# Altium PCB PCB1.PcbDoc
Units mil, origin at the board's own origin, x right, y up, seen from the top; angles counter-clockwise.
Board outline 4380 x 3975 mil, 2 copper layers (Top Layer, Bottom Layer); 36 components, 30 nets, 136 pads, 0 vias.
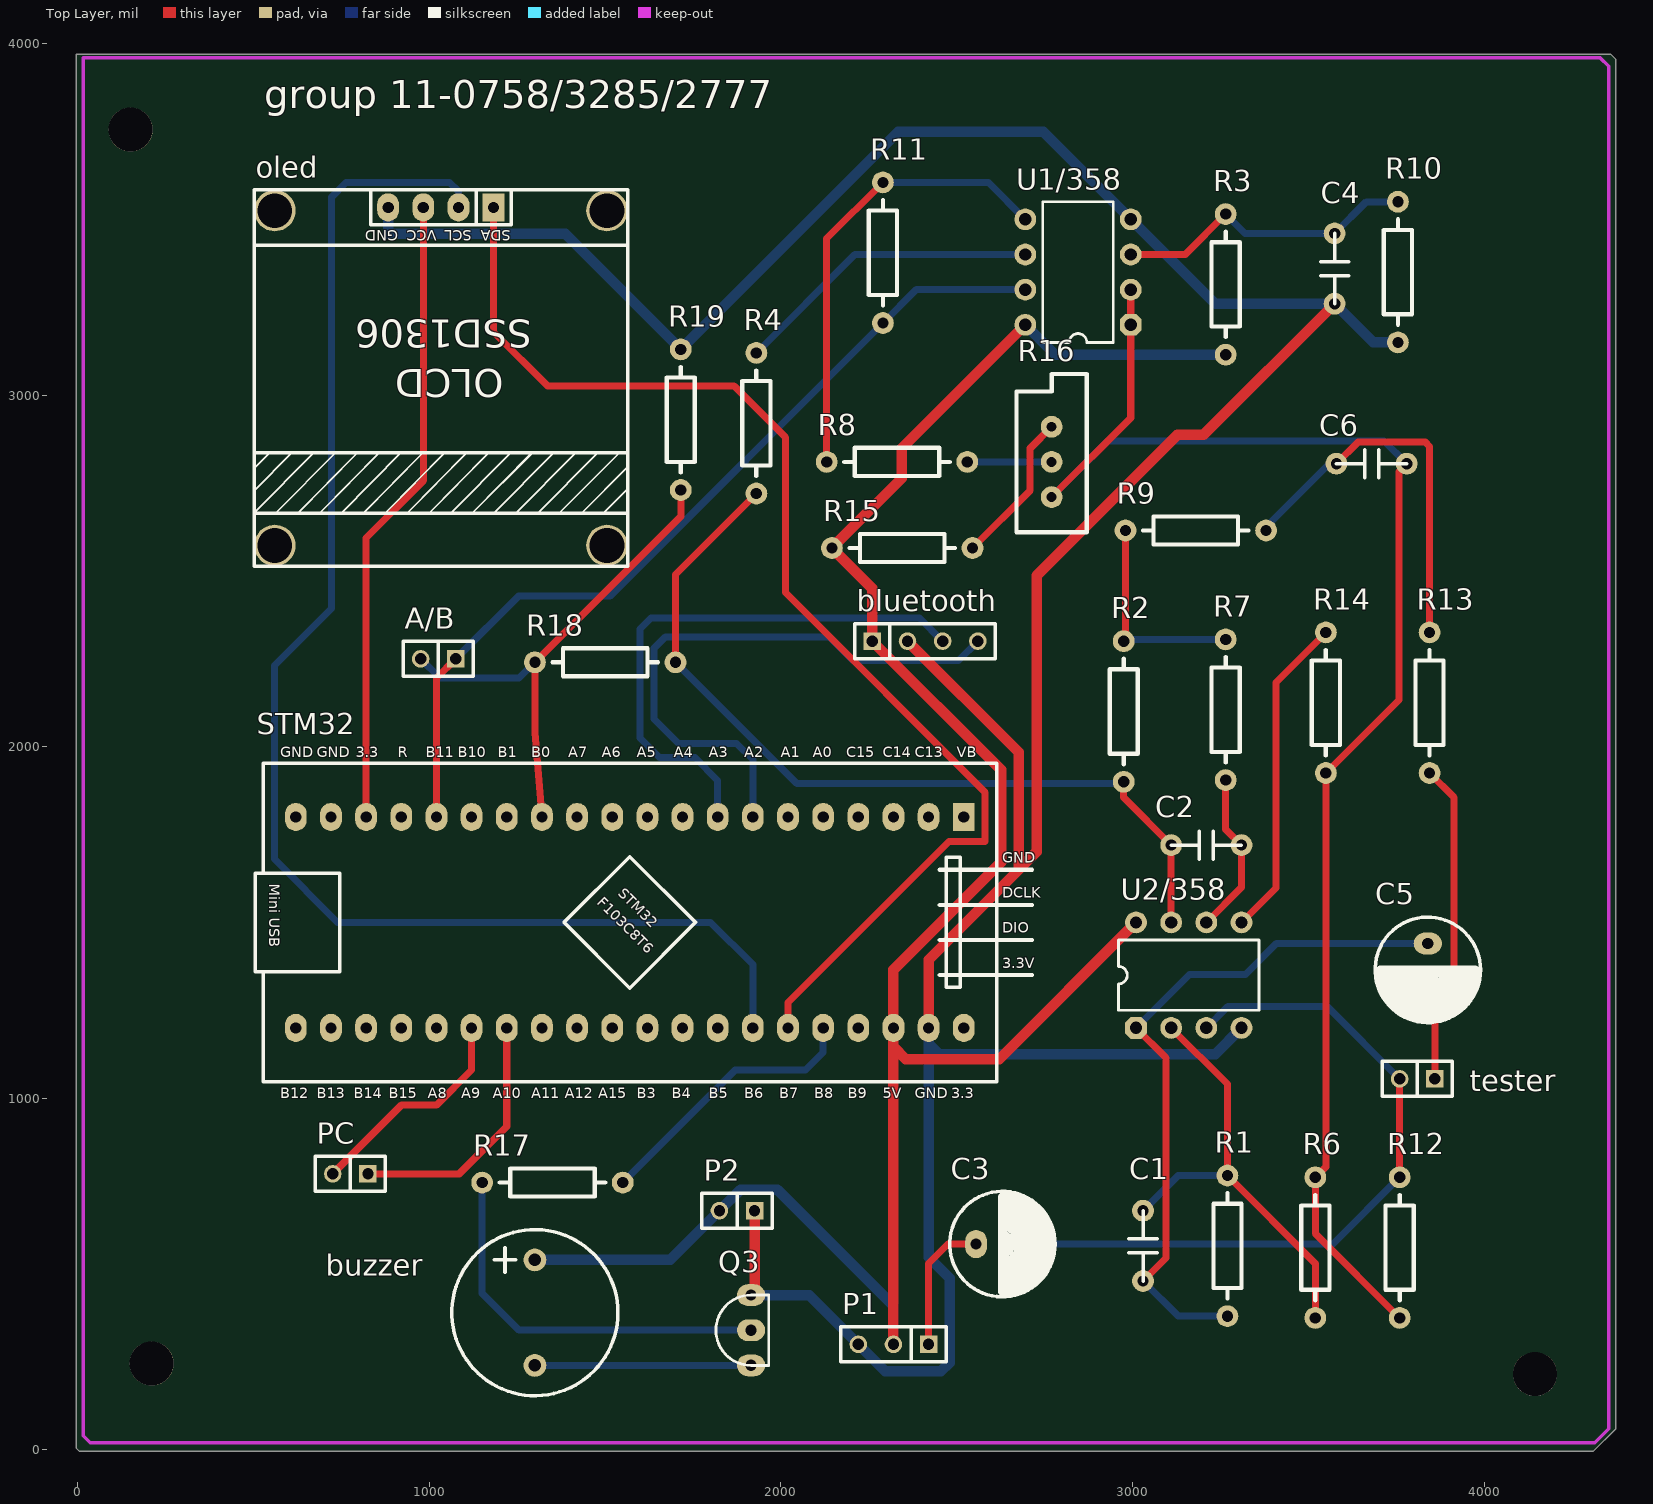
[diagram p0: Top Layer view]
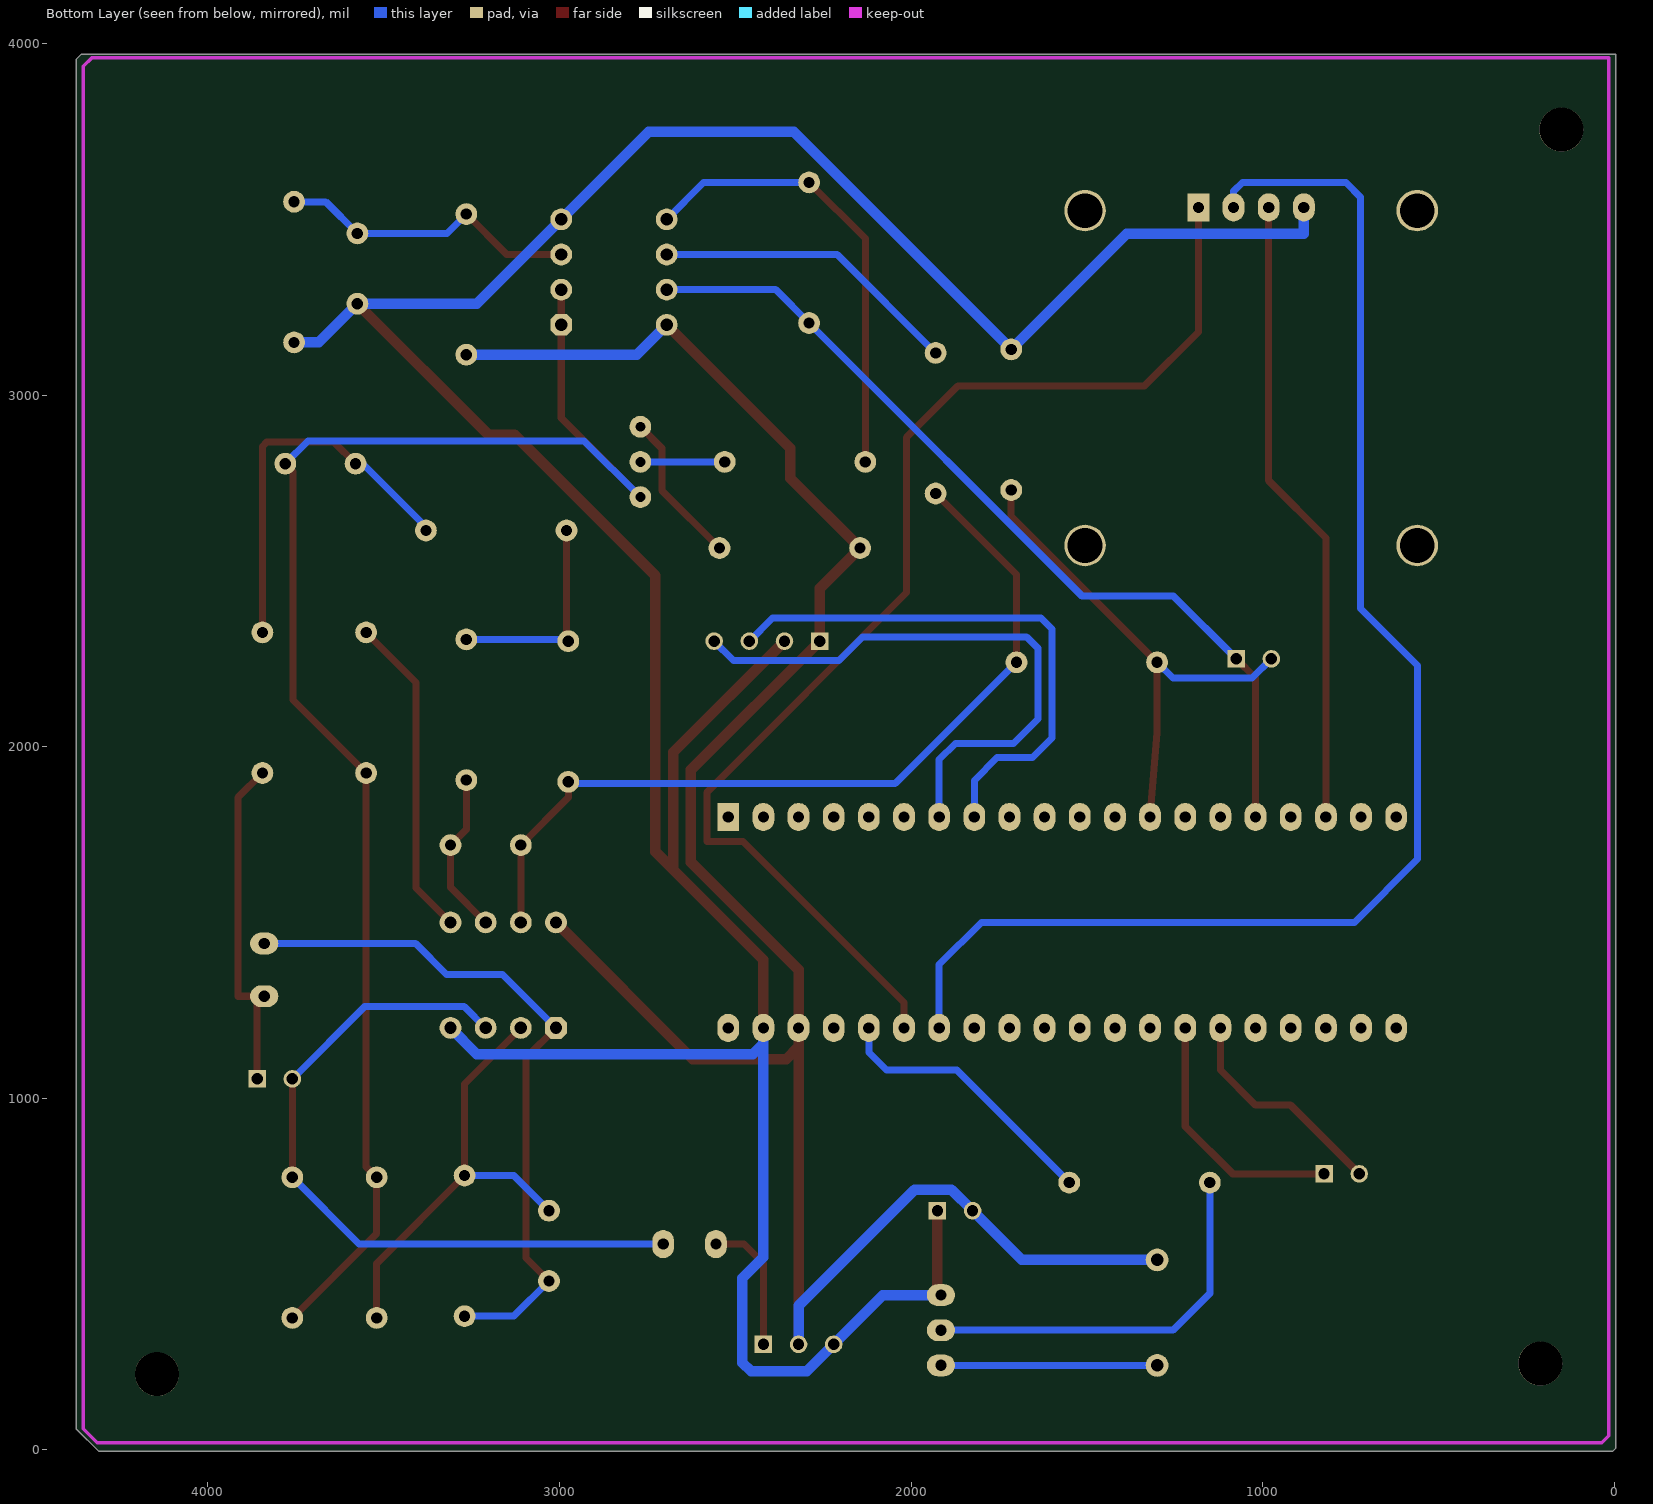
[diagram p1: Bottom Layer view, seen from below]

## Layer stack, top to bottom
Top Solder: solder mask 0.4, Solder Resist, Dk 3.5
Top Layer: signal copper 1.4
Dielectric1: dielectric 12.6, FR-4, Dk 4.8
Bottom Layer: signal copper 1.4
Bottom Solder: solder mask 0.4, Solder Resist, Dk 3.5

## Board outline
-5,5 5,-5 4310,-5 4375,60 4375,3955 4360,3970 -5,3970

## Design rules (kind name [scope] priority, off if disabled: settings)
Clearance [All] p1: gap=20 ignorepadtopadclearanceinfootprint=TRUE
FabricationTestPointUsage TestPointUsage [All] p1: valid=0 allowmultiple=FALSE
FabricationTestpoint Testpoint [All] p1: side=3 testpointundercomponent=TRUE minsize=40 maxsize=100 preferedsize=60 minholesize=0 maxholesize=40 preferedholesize=32 testpointgrid=1 allowsidetop=TRUE allowsidebottom=TRUE usegrid=TRUE gridtolerance=0.01
PolygonConnect [All] p1: connectstyle=Relief reliefconductorwidth=10 reliefentries=4 polygonreliefangle="90 Angle" airgapwidth=10
RoutingVias [All] p1: holewidth=28 width=50 viastyle="Through Hole" minholewidth=28 minwidth=50 maxholewidth=28 maxwidth=50
SilkToSolderMaskClearance SilkscreenOverComponentPads [IsPad] p1: minsilkscreentomaskgap=10 clearancetoexposedcopper=TRUE
SolderMaskExpansion [All] p1: expansion=4 istentingtop=FALSE
Width Width_2 [InNet('VDD')] p1: maxlimit=30 minlimit=10 preferedwidth=30 minimp=50.000000 maximp=50.000000 favimp=50.000000
Width Width_1 [InNet('GND')] p2: maxlimit=30 minlimit=30 preferedwidth=30 minimp=50.000000 maximp=50.000000 favimp=50.000000
Width [All] p3: maxlimit=30 minlimit=15 preferedwidth=20 minimp=50.000000 maximp=50.000000 favimp=50.000000
27 further rules are at their usual default settings.

## Components (designator, comment, footprint, x,y, rotation, side; value= is the part's Value field where it differs from the comment)
A/B "A\Btester" SIP2 1075,2250 r180 top (schematic designator P3)
bluetooth "blue-tooth" SIP4 2260,2300 r0 top (schematic designator P5)
buzzer "BUZZER" Buzzer 1300,540 r270 top (schematic designator U4)
C1 "0.01uF" C2 3030,680 r270 top value=10pF
C2 "0.1uF" C2 3310,1720 r180 top value=10pF
C3 "2.2uF" RB.15/.3 2555,585 r0 top
C4 "0.1uF" C2 3575,3260 r90 top value=10pF
C5 "2.2uF" RB.15/.3 3840,1440 r270 top
C6 "1uF" C2 3580,2805 r0 top value=10pF
oled "oled" SSD1306 501.06,3584.06 r180 top (schematic designator P6)
P1 "Header 3" SIP3 2420,300 r180 top
P2 "source" SIP2 1925,680 r180 top
PC "PC" SIP2 825,785 r180 top (schematic designator P4)
Q3 "NPN" TO-P2 1915,240 r90 top
R1 "1.2M" AXIAL0.4 3270,780 r270 top
R2 "200k" AXIAL0.4 2975,1900 r90 top
R3 "47k" AXIAL0.4 3265,3115 r90 top
R4 "10k" AXIAL0.4 1930,3120 r270 top
R6 "10k" AXIAL0.4 3520,775 r270 top
R7 "20k" AXIAL0.4 3265,1905 r90 top
R8 "10k" AXIAL0.4 2130,2810 r0 top
R9 "20k" AXIAL0.4 3380,2615 r180 top
R10 "47k" AXIAL0.4 3755,3550 r270 top
R11 "200k" AXIAL0.4 2290,3605 r270 top
R12 "10k" AXIAL0.4 3760,375 r90 top
R13 "20k" AXIAL0.4 3845,1925 r90 top
R14 "20k" AXIAL0.4 3550,1925 r90 top
R15 "20k" AXIAL0.4 2545,2565 r180 top
R16 "RPot" VR5 2770,2710 r90 top value=1K
R17 "1k" AXIAL0.4 1150,760 r0 top
R18 "1k" AXIAL0.4 1300,2240 r0 top
R19 "1.5k" AXIAL0.4 1715,2730 r90 top
STM32 "STM32103C8T6" STM32F103C8T6 1570,1500 r270 top
tester "Header 2" SIP2 3860,1055 r180 top (schematic designator P)
U1/358 "LM358J" DIP-8 2995,3200 r180 top (schematic designator U1)
U2/358 "LM358J" DIP-8 3010,1200 r90 top (schematic designator U2)

## Footprints (in the part's own frame and the unit in brackets; to place one, negate y for a bottom-side part, rotate by r counter-clockwise, add the part's x,y. Pads: shape width x height; smd on the part's side, far side on the other; paste and mask are expansions set on the pad)
AXIAL0.4 [mil]
  round 62 hole 32: 1(0,0) 2(400,0)
  silkscreen extent 50,-40 350,40
Buzzer [mil] "蜂鸣器"
  round 65 hole 36: 1(0,0) 2(300,0)
  silkscreen extent -86,-236 386,236
C2 [mil]
  round 62 hole 32: 1(0,0) 2(200,0)
  silkscreen extent 0,-40 200,40, body extent -59,-49 256,49, height 413
DIP-8 [mil]
  oct 62x62 hole 35: 1(0,0)
  round 62 hole 35: 2(0,-100) 3(0,-200) 4(0,-300) 5(300,-300) 6(300,-200) 7(300,-100) 8(300,0)
  silkscreen extent 50,-350 250,50
RB.15/.3 [mil]
  oval 62x80 hole 32: 1(0,0) 2(150,0)
  silkscreen extent -75,-150 225,150, body extent -82,-159 232,155, height 504
SIP2 [mil]
  rect 50x50 hole 32: 1(0,0)
  round 50 hole 32: 2(100,0)
  silkscreen extent -50,-50 150,50
SIP3 [mil]
  rect 50x50 hole 32: 1(0,0)
  round 50 hole 32: 2(100,0) 3(200,0)
  silkscreen extent -50,-50 250,50
SIP4 [mil]
  rect 50x50 hole 32: 1(0,0)
  round 50 hole 32: 2(100,0) 3(200,0) 4(300,0)
  silkscreen extent -50,-50 350,50
SSD1306 [mm] "OLCD"
  round 3 hole 2.5: 0(-25.5,25.7) 0(-25.5,1.5) 0(-1.5,25.7) 0(-1.5,1.5)
  rect 1.575x2.032 hole 0.813: 1(-17.31,1.27)
  oval 1.575x2.032 hole 0.813: 2(-14.77,1.27) 3(-12.23,1.27) 4(-9.69,1.27)
  silkscreen extent -27.03,0 0.03,27.2, body extent -18.58,0 -8.42,2.54, height 3
STM32F103C8T6 [mil]
  rect 80x62 hole 32: 1(-300,950)
  oval 80x62 hole 32: 2(-300,850) 3(-300,750) 4(-300,650) 5(-300,550) 6(-300,450) 7(-300,350) 8(-300,250) 9(-300,150) 10(-300,50) 11(-300,-50) 12(-300,-150) 13(-300,-250) 14(-300,-350) 15(-300,-450) 16(-300,-550) 17(-300,-650) 18(-300,-750) 19(-300,-850) 20(-300,-950) 21(300,-950) 22(300,-850) 23(300,-750) 24(300,-650) 25(300,-550) 26(300,-450) 27(300,-350) 28(300,-250) 29(300,-150) 30(300,-50) 31(300,50) 32(300,150) 33(300,250) 34(300,350) 35(300,450) 36(300,550) 37(300,650) 38(300,750) 39(300,850) 40(300,950)
  silkscreen extent -453,-1066 453,1144, body extent -305,-1032 305,1032, height 224
TO-P2 [mil]
  oval 62x80 hole 32: 1(0,0) 2(100,0) 3(200,0)
  silkscreen extent 0,-50 200,100
VR5 [mil]
  round 62 hole 28: 1(0,0) 2(200,0) 3(100,0)
  silkscreen extent -100,-100 350,100

## Part data
A/B P2 PC: library part "Header 2", "Header, 2-Pin", LatestRevisionDate=17-Jul-2002, LatestRevisionNote="Re-released for DXP Platform.", Publisher="Altium Limited"
bluetooth oled: library part "Header 4", "Connector"
buzzer: "Buzzer"
C1 C2 C4 C6: library part Cap, "Capacitor", LatestRevisionDate=17-Jul-2002, LatestRevisionNote="Re-released for DXP Platform.", PackageDescription="Radial Cap, Thru-Hole; 2 Leads; 0.3 in Pin Spacing", PackageReference=RAD-0.3, Published=8-Jun-2000, Publisher="Altium Limited"
C3 C5: library part Cap2, "电解电容"
P1: "Header, 3-Pin", LatestRevisionDate=17-Jul-2002, LatestRevisionNote="Re-released for DXP Platform.", Publisher="Altium Limited"
Q3: "NPN Bipolar Transistor", Code_JEDEC=TO-226-AA, LatestRevisionDate=17-Jul-2002, LatestRevisionNote="Re-released for DXP Platform.", PackageReference=TO-226, Published=8-Jun-2000, Publisher="Altium Limited"
R1 R2 R3 R4 R6 R7 R8 R9 R10 R11 R12 R13 R14 R15 R17 R18 R19: library part RES1
R16: "Potentiometer", LatestRevisionDate=17-Jul-2002, LatestRevisionNote="Re-released for DXP Platform.", PackageDescription="Variable Resistor, Thru-Hole; 3 Leads", PackageReference=VR5, Published=8-Jun-2000, Publisher="Altium Limited", Set Position=0.5, Sim Note="Enter the Resistance value and the set point into parameter fields."
tester: "Header, 2-Pin", LatestRevisionDate=17-Jul-2002, LatestRevisionNote="Re-released for DXP Platform.", Publisher="Altium Limited"
U1/358 U2/358: "Dual Low-Power Operational Amplifier", Code_JEDEC=MO-001-AN, ComponentLink1Description="Manufacturer Link", ComponentLink1URL=http://www.onsemi.com/site/products/parametrics/0,4446,251,00.html, ComponentLink2Description=Datasheet, ComponentLink2URL=http://www.onsemi.com/pub/Collateral/LM358-D.PDF, DatasheetVersion=1988, LatestRevisionDate=06-Jun-2005, LatestRevisionNote="Stylized 3D Model Added.", PackageDescription="DIP; 8 Leads; Row Spacing 7.62 mm; Pitch 2.54 mm", PackageReference=693-02, Published=17-Jul-2002, Publisher="Altium Limited"

## Free pads (board coordinates)
  round 125 hole 125 unplated paste+0: ""(150,3755)
  round 125 hole 125: ""(210,245)
  round 125 hole 125 unplated: ""(4145,215)

## Nets (pads, with @x,y where several pads share a name; then routed paths per layer and width w, separated by ;. In a path a pad name is that pad's centre, name@x,y a point inside that pad or via, vN(x,y) a via of type N, cw(c..) or ccw(c..) an arc to the next point about the centre after c; other vN are vias at no path point)
0-RX: PC.1 STM32.27 | length 730.9
  Top Layer w20: PC.1 1085,785 1220,920 STM32.27
0-TX: PC.2 STM32.26 | length 637.2
  Top Layer w20: PC.2 920,980 1020,980 1120,1080 STM32.26
A: C2.2 R2.1 R4.2 R18.2 U2/358.7 | length 2449.1
  Top Layer w20: R18.2 1700,2490 R4.2 ; R2.1 2975,1855 C2.2 U2/358.7
  Bottom Layer w20: R18.2 2045,1895 R2.1@2975,1895
B: A/B.1 R11.2 STM32.16 U1/358.7 | length 2527.7
  Top Layer w20: STM32.16 1020,2195 A/B.1
  Bottom Layer w20: A/B.1 1253,2428 1513,2428 R11.2 2385,3300 U1/358.7
GND: bluetooth.2 C4.1 oled.4 P1.3 P2.1 Q3.3 R10.2 R19.2 STM32.39 U1/358.4 U2/358.4 | length 9776.5
  Top Layer w30: Q3.3 1925,440 P2.1 ; bluetooth.2 2676,1984 2676,1650 ; STM32.39 2420,1394 2676,1650 ; C4.1 3202,2887 3128,2887 2727,2486 2727,1701 2676,1650
  Bottom Layer w30: oled.4 882.56,3459 1386,3459 R19.2 2334,3749 2746,3749 U1/358.4 3235,3260 C4.1 3685,3150 R10.2 ; Q3.3 2080,440 P1.3 2297,223 2455,223 2480,248 2480,488 2420,548 2420,1155 ; STM32.39 2420,1155 ; U2/358.4 3235,1125 2450,1125 2420,1155
NetC1_1: C1.1 R1.1 R6.2 U2/358.2 | length 1276.2
  Top Layer w20: U2/358.2 3270,1040 R1.1 3520,530 R6.2
  Bottom Layer w20: C1.1 3130,780 R1.1
NetC1_2: C1.2 C5.1 R1.2 U2/358.1 | length 1993
  Top Layer w20: U2/358.1 3095,1115 3095,545 C1.2
  Bottom Layer w20: U2/358.1 3162,1352 3321,1352 3409,1440 C5.1 ; C1.2 3130,380 R1.2
NetC2_1: C2.1 R7.1 U2/358.6 | length 465.1
  Top Layer w20: U2/358.6 3310,1600 C2.1 3265,1765 R7.1
NetC3_1: C3.1 P1.1 | length 387.8
  Top Layer w20: P1.1 2420,530 2475,585 C3.1
NetC4_2: C4.2 R3.2 R10.1 U1/358.3 | length 867.7
  Top Layer w20: U1/358.3 3150,3400 R3.2
  Bottom Layer w20: R3.2 3320,3460 C4.2 3665,3550 R10.1
NetC6_1: C6.1 R9.1 R13.2 | length 1113.1
  Top Layer w20: C6.1 3641,2866 3833.28,2866 3845,2854.28 R13.2
  Bottom Layer w20: R9.1@3370,2615 3560,2805 C6.1
NetP3_2: A/B.2 R18.1 R19.1 STM32.13 | length 1469.2
  Top Layer w20: STM32.13 1300,2040 R18.1 1715,2655 R19.1
  Bottom Layer w20: A/B.2 1030,2195 1255,2195 R18.1
NetQ3_1: buzzer.2 Q3.1 | length 615
  Bottom Layer w20: buzzer.2 Q3.1
NetQ3_2: Q3.2 R17.1 | length 1123.5
  Bottom Layer w20: R17.1 1150,445 1255,340 Q3.2
NetR2_2: R2.2 R7.2 R9.2 | length 612.1
  Top Layer w20: R2.2@2980,2295 R9.2
  Bottom Layer w20: R2.2 2980,2305 R7.2
NetR4_1: R4.1 U1/358.6 | length 881
  Bottom Layer w20: R4.1 2210,3400 U1/358.6
NetR8_1: R8.1 R11.1 U1/358.5 | length 1309.8
  Top Layer w20: R8.1 2130,3445 R11.1
  Bottom Layer w20: R11.1 2590,3605 U1/358.5
NetR8_2: R8.2 R16.3 | length 240
  Bottom Layer w20: R8.2 R16.3
NetR14_2: R14.2 U2/358.5 | length 924.4
  Top Layer w20: U2/358.5 3408,1598 3408,2183 R14.2
NetR15_1: R15.1 R16.2 | length 438.2
  Top Layer w20: R15.1 2709,2729 2709,2849 R16.2
NetR17_2: R17.2 STM32.36 | length 793.3
  Bottom Layer w20: R17.2 1870,1080 2070,1080 2120,1130 STM32.36
RX: bluetooth.3 STM32.8 | length 1586.3
  Bottom Layer w20: STM32.8 1820,1904 1755,1969 1655,1969 1599,2025 1599,2335 1630,2366 2394,2366 bluetooth.3
SCL: oled.2 STM32.34 | length 4050.6
  Bottom Layer w20: oled.2 1082.56,3580 1057.56,3605 763,3605 721,3563 721,2393 559,2231 559,1680 739,1500 1800,1500 1920,1380 STM32.34
SDA: oled.1 STM32.35 | length 3516.7
  Top Layer w20: oled.1 1182.56,3180 1336.56,3026 1867,3026 2013,2880 2013,2438 2581,1870 2581,1730 2478,1730 2020,1272 STM32.35
TESTER1: C3.2 R12.2 tester.2 U2/358.3 | length 2074.3
  Top Layer w20: R12.2 tester.2
  Bottom Layer w20: C3.2 3570,585 R12.2 ; U2/358.3 3271,1261 3554,1261 tester.2
TESTER2: C5.2 R13.1 tester.1 | length 972.6
  Top Layer w20: C5.2 C5.2@3860,1290 ; R13.1 3914,1856 3914,1290 C5.2@3860,1290 ; tester.1 C5.2@3860,1290
TX: bluetooth.4 STM32.7 | length 1677.8
  Bottom Layer w20: STM32.7 1920,1963 1873.71,2009.29 1708.71,2009.29 1639,2079 1639,2280 1671,2312 2138,2312 2205,2245 2505,2245 bluetooth.4
VCC3.3V: oled.3 STM32.18 | length 1801.4
  Top Layer w20: STM32.18 820,2594 982.56,2756.56 oled.3
VD: C6.2 R6.1 R12.1 R14.1 R16.1 U1/358.1 U1/358.2 | length 4423.5
  Top Layer w20: R16.1 2995,2935 U1/358.1 U1/358.2 ; R12.1 3520,615 R6.1 3550,805 R14.1 3758,2133 3758,2783 C6.2
  Bottom Layer w20: R16.1 2930,2870 3715,2870 C6.2
VDD: bluetooth.1 buzzer.1 P1.2 P2.2 R3.1 R15.2 STM32.38 U1/358.8 U2/358.8 | length 6274.2
  Top Layer w30: P1.2 2320,1146 ; U1/358.8 2493,2998 2343.86,2848.86 2343.86,2763.86 R15.2 2260,2450 bluetooth.1 2626,1934 2626,1671 2320,1365 STM32.38 2320,1146 ; U2/358.8 2621,1111 2355,1111 2320,1146
  Bottom Layer w30: buzzer.1 1685,540 P2.2 1885,740 1990,740 2320,410 P1.2 ; U1/358.8 2780,3115 R3.1
pads on no net: oled.0 STM32.1 STM32.2 STM32.3 STM32.4 STM32.5 STM32.6 STM32.9 STM32.10 STM32.11 STM32.12 STM32.14 STM32.15 STM32.17 STM32.19 STM32.20 STM32.21 STM32.22 STM32.23 STM32.24 STM32.25 STM32.28 STM32.29 STM32.30 STM32.31 STM32.32 STM32.33 STM32.37 STM32.40

## Keep-outs
Keep-Out Layer:
  lines w10: 15,40 35,20 4315,20 4355,60 4355,3935 4330,3960 15,3960 15,40

## Silkscreen, mask and mechanical layers (free items; w line width, h text height)
Top Overlay:
  text "group 11-0758/3285/2777" at 530,3816.66 h80
Mechanical 1:
  the board outline again, w10

## Text inside footprints (layer, text, board x,y; h text height)
oled: Top Overlay "OLCD" at 1211.06,3074.06 h80 r180; Top Overlay "SSD1306" at 1291.06,3214.06 h80 r180; Top Overlay "SDA" at 1231.06,3469.06 h30 r180; Top Overlay "SCL" at 1121.06,3469.06 h30 r180; Top Overlay "VCC" at 1021.06,3469.06 h30 r180; Top Overlay "GND" at 911.06,3469.06 h30 r180
STM32: Top Overlay "F103C8T6" at 1475,1555 h30 r315; Top Overlay "3.3" at 2485,1000 h30; Top Overlay "GND" at 2380,1000 h30; Top Overlay "B4" at 1690,1000 h30; Top Overlay "5V" at 2290,1000 h30; Top Overlay "B9" at 2190,1000 h30; Top Overlay "B8" at 2095,1000 h30; Top Overlay "B7" at 1995,1000 h30; Top Overlay "B6" at 1895,1000 h30; Top Overlay "B5" at 1795,1000 h30; Top Overlay "B3" at 1590,1000 h30; Top Overlay "A15" at 1480,1000 h30; Top Overlay "A12" at 1385,1000 h30; Top Overlay "A11" at 1290,1000 h30; Top Overlay "A10" at 1180,1000 h30; Top Overlay "A9" at 1090,1000 h30; Top Overlay "A8" at 995,1000 h30; Top Overlay "B15" at 885,1000 h30; Top Overlay "B14" at 785,1000 h30; Top Overlay "B13" at 680,1000 h30; Top Overlay "B12" at 575,1000 h30; Top Overlay "GND" at 575,1970 h30; Top Overlay "GND" at 680,1970 h30; Top Overlay "3.3" at 790,1970 h30; Top Overlay "R" at 910,1970 h30; Top Overlay "B11" at 990,1970 h30; Top Overlay "B10" at 1080,1970 h30; Top Overlay "B1" at 1195,1970 h30; Top Overlay "B0" at 1290,1970 h30; Top Overlay "A7" at 1395,1970 h30; Top Overlay "A6" at 1490,1970 h30; Top Overlay "A5" at 1590,1970 h30; Top Overlay "A4" at 1695,1970 h30; Top Overlay "A3" at 1795,1970 h30; Top Overlay "A2" at 1895,1970 h30; Top Overlay "A1" at 2000,1970 h30; Top Overlay "A0" at 2090,1970 h30; Top Overlay "C15" at 2185,1970 h30; Top Overlay "C14" at 2290,1970 h30; Top Overlay "C13" at 2380,1970 h30; Top Overlay "VB" at 2500,1970 h30; Top Overlay "Mini USB" at 545,1609.76 h30 r270; Top Overlay "GND" at 2630,1670 h30; Top Overlay "DCLK" at 2630,1570 h30; Top Overlay "DIO" at 2630,1470 h30; Top Overlay "3.3V" at 2630,1370 h30